# EAGLE board P.V.S.AVINASH AS-3 (EAGLE 9.6.2)
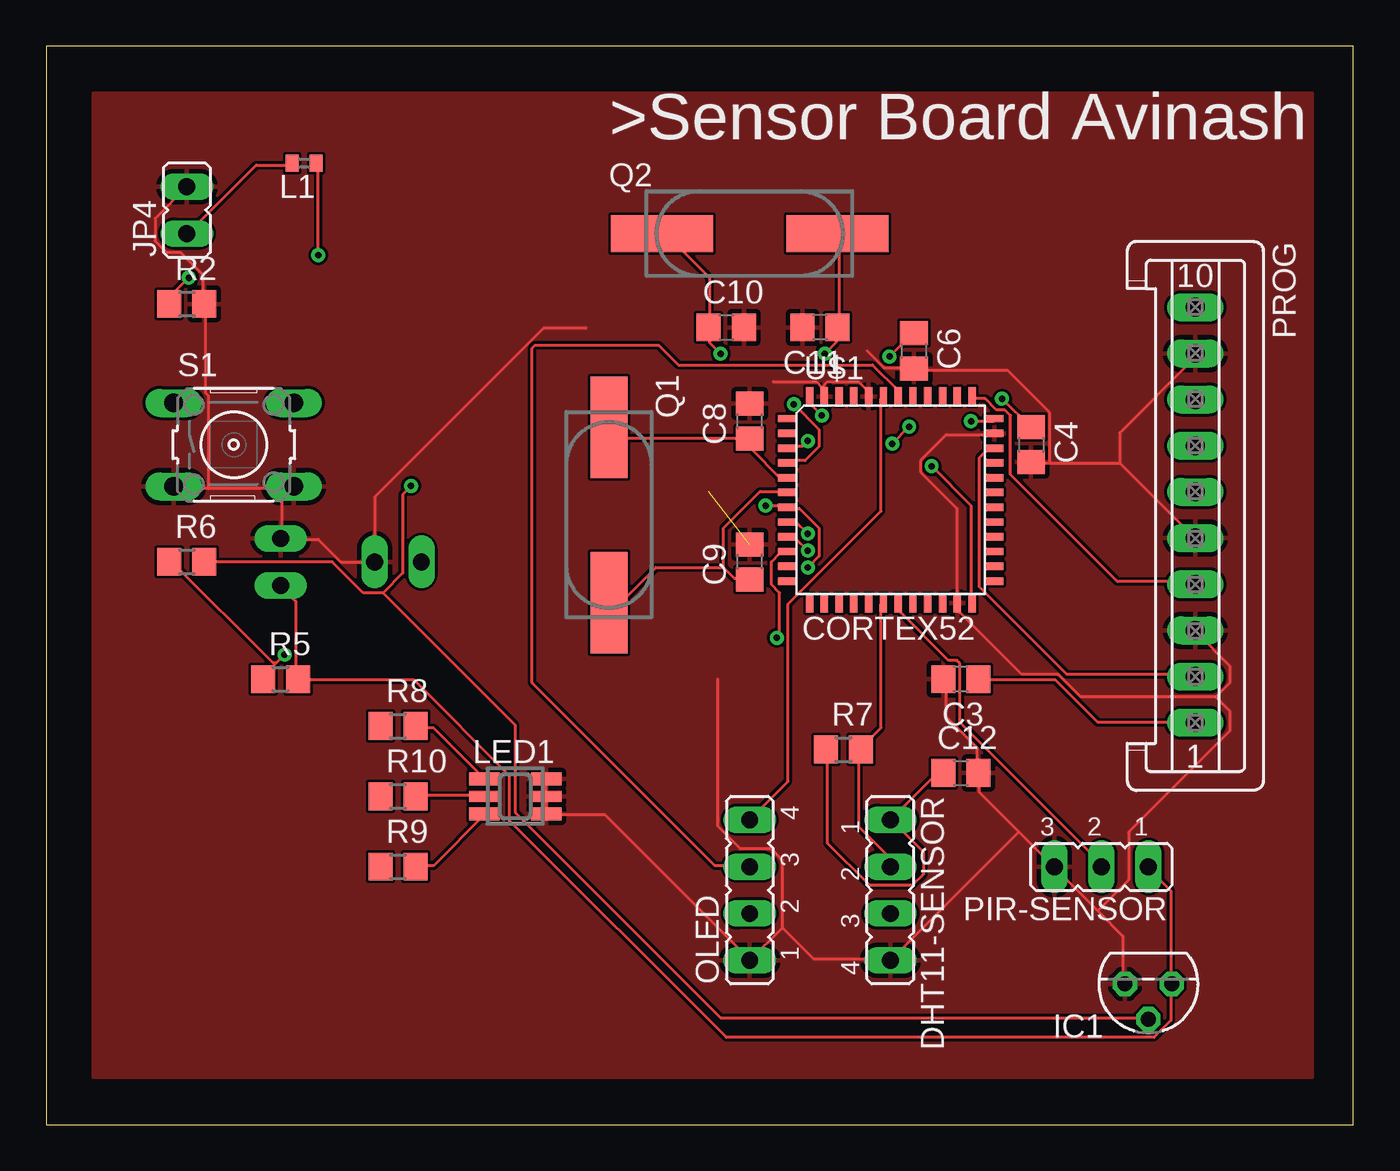
[diagram p0: board, top side]
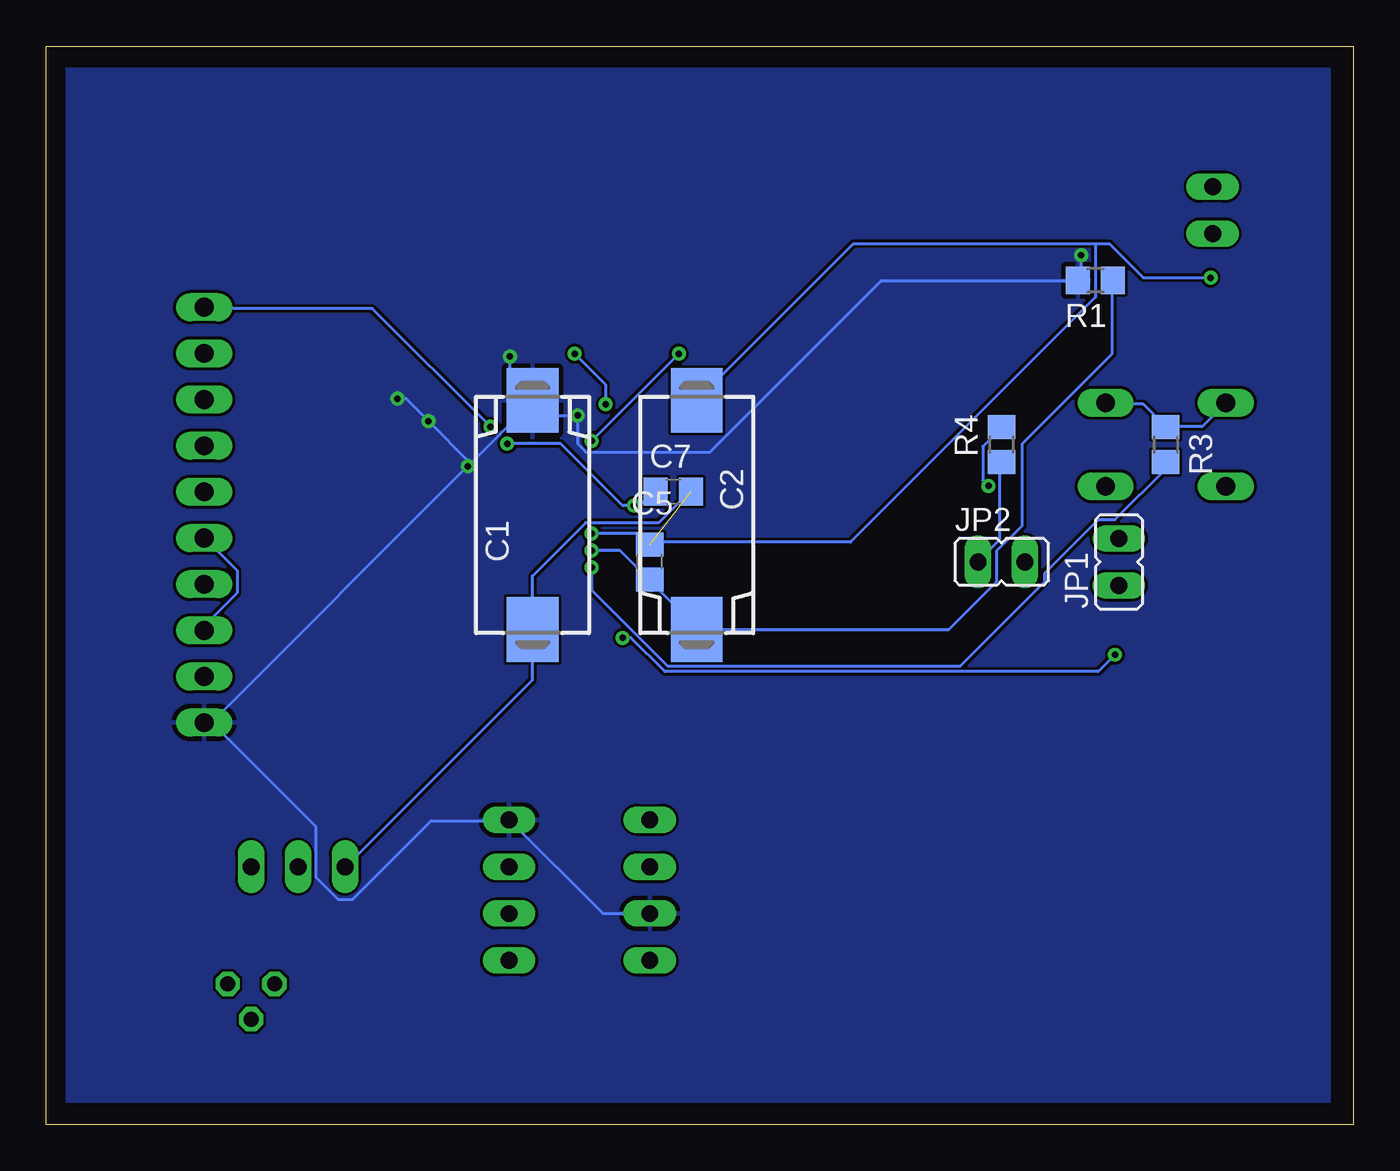
[diagram p1: board, bottom side, seen from below]

Size 70.79 x 58.41 mm. Coordinates in mm from the lower left corner, seen from the top.
Outline: 0,0 70.79,0 70.79,58.41 0,58.41 0,0
Copper layers (1*16): Top 0.035mm / dielectric 1.5mm / Bottom 0.035mm
Design rules "default": minimum track width 6mil, minimum drill 0.35mm, track to track 6mil, track to pad 6mil, pad to pad 6mil, via to via 6mil, smd to smd 6mil, copper to edge 40mil, drill to drill 6mil, minimum pad ring 10mil, minimum via ring 8mil, stop-mask expansion 4mil, vias tented up to drill 0mil, thermal gap 10mil

## Footprints (pad centres in the part's own frame; a part is rotated, then mirrored left to right if it is on the bottom)
139CLL-2R = smd 3.5 x 2.8: + 6.2,0; - -6.2,0
C0805 = smd 1.3 x 1.5: 1 -0.95,0; 2 0.95,0
JP4 = drill 0.914 long: 1 -3.81,0; 2 -1.27,0; 3 1.27,0; 4 3.81,0
TO92 = drill 0.813 octagon: 1 -1.27,0; 2 0,1.905; 3 1.27,0
JP1 = drill 0.914 long: 1 0,-1.27; 2 0,1.27
0402 = smd 0.7 x 0.9: 1 -0.65,0; 2 0.65,0
GM5WA94310A = smd 0.7 x 1.65: 1 -0.95,-1.675; 3 0.95,-1.675; 4 0.95,1.675; 6 -0.95,1.675 | smd 0.6 x 1.65: 2 0,-1.675; 5 0,1.675
JP2 = drill 0.914 long: 1 -2.54,0; 2 0,0; 3 2.54,0
S10P = drill 1.016 long: 1 11.25,0; 2 8.75,0; 3 6.25,0; 4 3.75,0; 5 1.25,0; 6 -1.25,0; 7 -3.75,0; 8 -6.25,0; 9 -8.75,0; 10 -11.25,0
CSM-7X-DU = smd 5.5 x 2: 1 -4.75,0; 2 4.75,0
R0805 = smd 1.3 x 1.5: 1 -0.95,0; 2 0.95,0
B3F-10XX = drill 1.016 long: 1 -3.251,2.261; 2 3.251,2.261; 3 -3.251,-2.261; 4 3.251,-2.261
CORTEX52 = smd 0.4 x 1: BOOT0 3.9,11.5; PA3 0.7,0.3; PA4 1.5,0.3; PA5 2.3,0.3; PA6 3.1,0.3; PA7 3.9,0.3; PA14 9.5,11.5; PA15 8.7,11.5; PB0 4.7,0.3; PB1 5.5,0.3; PB2 6.3,0.3; PB3 7.9,11.5; PB4 7.1,11.5; PB5 6.3,11.5; PB6 5.5,11.5; PB7 4.7,11.5; PB8 3.1,11.5; PB9 2.3,11.5; PB10 7.1,0.3; PB11 7.9,0.3; VDD0 9.5,0.3; VDD2 0.7,11.5; VSS0 8.7,0.3; VSS2 1.5,11.5 | smd 1 x 0.4: NRST -0.5,5.5; OSC32_IN -0.5,8.7; OSC32_OUT -0.5,7.9; OSC_IN -0.5,7.1; OSC_OUT -0.5,6.3; PA0 -0.5,3.1; PA1 -0.5,2.3; PA2 -0.5,1.5; PA8 10.7,4.7; PA9 10.7,5.5; PA10 10.7,6.3; PA11 10.7,7.1; PA12 10.7,7.9; PA13 10.7,8.7; PB12 10.7,1.5; PB13 10.7,2.3; PB14 10.7,3.1; PB15 10.7,3.9; PC13 -0.5,9.5; VDD_USB 10.7,10.3; VDDA -0.5,3.9; VLCD -0.5,10.3; VSS1 10.7,9.5; VSSA -0.5,4.7

## Placement (x,y rotation side)
C1  10uF  [139CLL-2R]  44.45,33.02 90 bottom
C2  1uF  [139CLL-2R]  35.56,33.02 270 bottom
C3  100nF  [C0805]  49.53,24.13 180 top
C4  100nF  [C0805]  53.34,36.83 270 top
C5  100nF  [C0805]  38.1,30.48 90 bottom
C6  100nF  [C0805]  46.99,41.91 270 top
C7  100nF  [C0805]  36.83,34.29 0 bottom
C8  16pF  [C0805]  38.1,38.1 90 top
C9  16pF  [C0805]  38.1,30.48 90 top
C10  12pF  [C0805]  36.83,43.18 0 top
C11  12pF  [C0805]  41.91,43.18 180 top
C12  100nF  [C0805]  49.53,19.05 0 top
DHT11-SENSOR  [JP4]  45.72,12.7 270 top
IC1  AD590ZR  [TO92]  59.69,7.62 180 top
JP1  [JP1]  12.7,30.48 0 bottom
JP2  [JP1]  19.05,30.48 270 bottom
JP4  [JP1]  7.62,49.53 0 top
L1  BLM15HD102SN1  [0402]  13.97,52.07 180 top
LED1  GM5WA94310A  [GM5WA94310A]  25.4,17.78 270 top
OLED  [JP4]  38.1,12.7 90 top
PIR-SENSOR  [JP2]  57.15,13.97 180 top
PROG  [S10P]  62.23,33.02 270 top
Q1  CSM-7X-DU  [CSM-7X-DU]  30.48,33.02 270 top
Q2  CSM-7X-DU  [CSM-7X-DU]  38.1,48.26 0 top
R1  0  [R0805]  13.97,45.72 180 bottom
R2  0  [R0805]  7.62,44.45 0 top
R3  0  [R0805]  10.16,36.83 270 bottom
R4  0  [R0805]  19.05,36.83 90 bottom
R5  10K  [R0805]  12.7,24.13 0 top
R6  10K  [R0805]  7.62,30.48 0 top
R7  5K  [R0805]  43.18,20.32 0 top
R8  [R0805]  19.05,21.59 0 top
R9  [R0805]  19.05,13.97 0 top
R10  [R0805]  19.05,17.78 0 top
S1  [B3F-10XX]  10.16,36.83 0 top
U$1  CORTEX52  [CORTEX52]  40.64,27.94 0 top

## Library data of the parts
C1-C12 = rcl; SPICEPREFIX: C
DHT11-SENSOR JP1 JP2 JP4 OLED PIR-SENSOR = jumper
IC1 = linear
L1 = inductors
LED1 = led
PROG = con-amp-mt; OC_FARNELL: unknown; OC_NEWARK: unknown
Q1 Q2 = crystal; OC_FARNELL: unknown; OC_NEWARK: unknown
R1-R10 = rcl; SPICEPREFIX: R
S1 = switch-omron; MPN: B3F-1000; OC_FARNELL: 176432; OC_NEWARK: 36M3542
U$1 = coxtex32

## Nets
5VCC: IC1.1 JP1.1 PIR-SENSOR.1 R5.2
32KHZOSC1: C10.1 Q2.1 U$1.OSC32_IN
32KHZOSC2: C11.1 Q2.2 U$1.OSC32_OUT
!5VCC: JP2.1 R4.1
AGND: C2.- C5.2 R2.1 U$1.VSSA
DHT11: DHT11-SENSOR.2 R7.2 U$1.PB0
GND: C1.- C3.2 C4.2 C6.2 C7.2 C8.2 C9.2 C10.2 C11.2 C12.2 DHT11-SENSOR.4 IC1.3 JP1.2 JP2.2 JP4.2 LED1.4 LED1.5 LED1.6 OLED.1 PIR-SENSOR.3 PROG.3 PROG.5 PROG.9 R2.2 S1.3 S1.4 U$1.BOOT0 U$1.VSS0 U$1.VSS1 U$1.VSS2
LM35: R5.1 R6.1 U$1.PA0
N$1: JP4.1 L1.2
N$2: R3.1 S1.1 S1.2
N$3: IC1.2 R4.2 R6.2
N$4: LED1.1 R8.2
N$5: U$1.VLCD
N$6: LED1.3 R9.2
N$7: LED1.2 R10.2
NRST: C7.1 PROG.10 R3.2 U$1.NRST
OLED_SCL: OLED.3 U$1.PB6
OLED_SDA: OLED.4 U$1.PB7
OSC1: C8.1 Q1.1 U$1.OSC_IN
OSC2: C9.1 Q1.2 U$1.OSC_OUT
PIR: PIR-SENSOR.2 U$1.PB1
PMW_B: R8.1
PMW_G: R9.1
PMW_R: R10.1
PWM_B: U$1.PB5
PWM_G: U$1.PB4
PWM_R: U$1.PB14
SWCLK: PROG.4 U$1.PA14
SWDIO: PROG.2 U$1.PA13
VCC: C1.+ C3.1 C4.1 C6.1 C12.1 DHT11-SENSOR.1 L1.1 OLED.2 PROG.1 R1.2 R7.1 U$1.VDD0 U$1.VDD2 U$1.VDD_USB
VDDA: C2.+ C5.1 R1.1 U$1.VDDA

## Tracks (layer width: path | path; a pad name or v marks a point on that pad's centre or on a via)
5VCC
  Top 0.152: JP1.1 12.75,29.11 13.51,28.35 13.51,24.23 R5.2 13.66,24.08 19.91,24.08 25.1,18.9 25.1,16.46 36.83,4.72 59.99,4.72 60.91,5.64 60.91,7.62 | 60.91,7.62 60.91,12.65 59.69,13.87 PIR-SENSOR.1 | 60.91,7.62 IC1.1
32KHZOSC1  (via drill 0.35)
  Top 0.152: v41.25,37.03 40.95,36.73 40.18,36.73 U$1.OSC32_IN | v36.53,41.76 35.92,42.37 35.92,43.13 C10.1 35.92,43.28 35.92,45.87 33.48,48.31 Q2.1
  Bottom 0.152: v36.53,41.76 v41.25,37.03
32KHZOSC2  (via drill 0.35)
  Top 0.152: v40.49,39.01 41.86,37.64 41.86,36.73 41.1,35.97 40.18,35.97 U$1.OSC32_OUT | v42.16,41.76 42.77,42.37 42.77,43.13 C11.1 42.93,43.28 42.93,48.16 Q2.2
  Bottom 0.152: v40.49,39.01 40.49,40.08 v42.16,41.76
!5VCC
  Bottom 0.152: R4.1 19.15,35.81 19.15,31.7 20.37,30.48 JP2.1
AGND  (via drill 0.35)
  Top 0.152: v41.25,32 40.64,32.61 40.18,32.61 U$1.VSSA | v7.72,45.87 6.81,44.96 6.81,44.5 R2.1
  Bottom 0.152: v41.25,32 38.66,32 38.2,31.55 C5.2 38.05,31.55 27.23,31.55 13.97,44.81 13.97,47.7 | v7.72,45.87 11.38,45.87 13.21,47.7 13.97,47.7 | 13.97,47.7 27.08,47.7 35.46,39.32 C2.-
DHT11
  Top 0.152: U$1.PB0 45.21,28.19 45.21,21.49 44.14,20.42 R7.2 43.99,20.27 43.99,16.15 45.67,14.48 45.67,14.02 DHT11-SENSOR.2
GND  (1 unrouted)
  Top 0.152: C3.2 48.72,24.08 48.72,22.1 50.39,20.42 50.39,19.05 C12.2 50.55,19.05 50.55,17.98 52.68,15.85 | 56.95,11.58 54.66,13.87 PIR-SENSOR.3 54.51,14.02 52.68,15.85 | 56.95,11.58 58.32,10.21 58.32,7.62 IC1.3 | 42.01,39.93 42.01,39.47 U$1.VSS2 42.01,39.93 | 42.01,39.93 41.71,40.23 39.37,40.23 | 42.01,39.93 42.32,40.23 43.99,40.23 44.45,39.78 44.45,39.47 U$1.BOOT0 | LED1.6 27.08,18.59 27.08,17.83 LED1.5 27.08,17.68 27.08,16.92 LED1.4 27.08,16.76 30.28,16.76 38.05,8.99 OLED.1 39.88,10.67 | 36.37,24.13 36.37,16.15 37.59,14.94 39.27,14.94 39.88,14.33 39.88,10.67 | 39.88,10.67 41.55,8.99 45.67,8.99 DHT11-SENSOR.4 52.68,15.85 | JP4.2 5.89,49.07 5.89,47.85 6.5,47.24 7.26,47.24 8.48,46.02 8.48,44.5 R2.2 8.64,44.35 8.64,39.62 8.79,39.47 8.79,34.44 | 12.75,33.83 12.75,31.85 JP1.2 12.75,31.7 14.73,31.7 15.95,30.48 JP2.2 17.78,33.98 26.92,43.13 29.21,43.13 29.21,43.18 | 12.75,33.83 13.36,34.44 S1.4 12.75,33.83 | 8.79,34.44 12.14,34.44 12.75,33.83 | 8.79,34.44 6.96,34.44 S1.3 | U$1.VSS1 51.31,37.34 48.72,37.34 47.35,35.97 47.35,35.36 49.33,33.38 49.33,28.35 U$1.VSS0 49.48,28.19 49.48,27.74 52.83,24.38 54.81,24.38 56.03,23.17 63.35,23.17 | 44.45,41.91 45.36,41 46.89,41 C6.2 47.04,40.84 52.07,40.84 54.36,38.56 54.36,35.81 | 58.17,35.81 54.36,35.81 | 54.36,35.81 53.44,35.81 C4.2 | 58.17,35.81 62.13,31.85 PROG.5 | 58.17,35.81 58.17,37.49 62.13,41.45 62.13,41.76 PROG.9 | 63.35,23.17 64.11,23.93 64.11,24.84 62.28,26.67 PROG.3 | 56.95,11.58 58.62,13.26 58.62,15.85 64.11,21.34 64.11,22.4 63.35,23.17
  Bottom 0.152: C7.2 35.92,34.29 37.59,32.61 41.55,32.61 44.45,29.72 C1.- 44.45,24.08 54.51,14.02 PIR-SENSOR.3 | PROG.3 62.13,26.82 62.13,27.13 60.45,28.8 60.45,30.02 62.13,31.7 PROG.5
  pour Top: 26.67,41.91 26.67,24.13 39.37,24.13 39.37,40.64 33.02,40.64 33.02,41.91
  pour Top: 29.21,52.07 46.99,52.07 46.99,45.72 46.99,44.45 44.45,44.45 44.45,41.91 34.29,41.91 34.29,43.18 29.21,43.18
  pour Top: 2.54,55.88 68.58,55.88 68.58,2.54 2.54,2.54
LM35  (via drill 0.35)
  Top 0.152: v39.57,26.37 39.73,26.52 39.73,28.8 39.27,29.26 39.27,30.48 39.73,30.94 40.03,30.94 U$1.PA0 | 12.45,24.99 11.68,24.23 R5.1 | 12.45,24.99 v12.9,25.45 | 12.45,24.99 12.29,24.99 6.81,30.48 R6.1
  Bottom 0.152: v39.57,26.37 39.12,26.37 37.29,24.54 13.82,24.54 v12.9,25.45
N$1
  Top 0.152: L1.2 13.21,51.97 11.38,51.97 7.72,48.31 JP4.1
N$2
  Bottom 0.152: 10.16,37.79 8.18,37.79 6.96,39.01 S1.1 | 10.16,37.79 11.38,39.01 13.36,39.01 S1.2 | 10.16,37.79 R3.1
N$3  (via drill 0.35)
  Top 0.152: R6.2 15.49,30.48 17.17,28.8 18.24,28.8 | 18.24,28.8 19.3,29.87 19.3,34.14 v19.76,34.59 | 18.24,28.8 25.4,21.64 25.4,16.92 36.53,5.79 59.69,5.79 IC1.2
  Bottom 0.152: v19.76,34.59 20.07,34.9 20.07,36.73 19.15,37.64 R4.2
N$4
  Top 0.152: R8.2 20.07,21.49 20.98,21.49 23.72,18.75 LED1.1
N$6
  Top 0.152: R9.2 20.07,14.02 20.98,14.02 23.72,16.76 LED1.3
N$7
  Top 0.152: R10.2 20.07,17.83 23.72,17.83 LED1.2
NRST  (via drill 0.35)
  Top 0.152: v38.96,33.53 40.03,33.53 U$1.NRST 40.18,33.38 40.79,33.38 41.86,32.31 41.86,30.79 v41.25,30.18 | v45.82,36.88 v46.74,37.79
  Bottom 0.152: C7.1 37.9,34.29 38.66,33.53 v38.96,33.53 39.57,33.53 42.93,36.88 v45.82,36.88 | R3.2 10.16,35.51 12.9,32.77 13.82,32.77 16.71,29.87 16.71,29.41 21.29,24.84 37.14,24.84 41.25,28.96 v41.25,30.18 | v46.74,37.79 53.14,44.2 62.13,44.2 PROG.10
OLED_SCL
  Top 0.152: U$1.PB6 46.13,39.47 46.13,39.78 44.75,41.15 34.24,41.15 33.17,42.21 26.47,42.21 26.31,42.06 26.31,23.93 36.22,14.02 38.05,14.02 OLED.3
OLED_SDA
  Top 0.152: OLED.4 40.18,18.59 40.18,28.19 45.21,33.22 45.21,39.32 U$1.PB7
OSC1
  Top 0.152: U$1.OSC_IN 40.03,35.05 39.73,35.05 38.2,36.58 38.2,37.03 C8.1 38.05,37.19 31.04,37.19 30.58,37.64 Q1.1
OSC2
  Top 0.152: 36.68,30.18 36.68,32.31 38.66,34.29 40.03,34.29 U$1.OSC_OUT | 36.68,30.18 37.29,29.57 38.05,29.57 C9.1 | 36.68,30.18 33.02,30.18 31.19,28.35 30.58,28.35 Q1.2
PIR
  Top 0.152: U$1.PB1 46.28,28.19 46.28,27.74 48.87,25.15 49.33,25.15 49.48,24.99 49.48,21.79 57.25,14.02 PIR-SENSOR.2
SWCLK
  Top 0.152: U$1.PA14 50.24,39.32 50.85,39.32 51.46,38.71 51.92,38.71 52.22,38.41 52.22,35.2 58.01,29.41 62.13,29.41 PROG.4
SWDIO
  Top 0.152: U$1.PA13 51.31,36.58 51,36.58 50.55,36.12 50.55,29.11 55.27,24.38 62.13,24.38 PROG.2
VCC  (via drill 0.35)
  Top 0.152: R7.1 42.32,20.27 42.32,15.24 44.6,12.95 46.89,12.95 47.5,13.56 47.5,14.78 45.82,16.46 DHT11-SENSOR.1 48.26,19.05 C12.1 | C3.1 50.55,24.08 54.66,24.08 56.95,21.79 62.13,21.79 PROG.1 | v14.73,47.09 14.73,51.97 L1.1 | v47.95,35.66 50.09,33.53 50.09,28.35 U$1.VDD0 | v42.01,38.41 41.4,39.01 41.4,39.32 U$1.VDD2 | v50.09,38.1 51.31,38.1 U$1.VDD_USB | v45.67,41.6 46.89,42.82 C6.1 | v51.77,39.32 53.29,37.79 C4.1
  Bottom 0.152: OLED.2 40.64,11.43 DHT11-SENSOR.1 45.82,16.46 49.94,16.46 54.2,12.19 54.97,12.19 56.19,13.41 56.19,16.15 61.82,21.79 | v14.73,47.09 14.73,45.87 14.88,45.72 R1.2 25.55,45.72 34.85,36.42 41.55,36.42 42.01,36.88 v42.01,38.41 43.69,38.41 44.45,39.17 | 44.45,39.17 47.8,35.81 | 44.45,39.17 C1.+ 44.45,39.32 45.67,40.54 v45.67,41.6 | 47.8,35.81 v50.09,38.1 51.31,39.32 v51.77,39.32 | 47.8,35.81 v47.95,35.66 61.82,21.79 | 61.82,21.79 62.13,21.79 PROG.1 61.82,21.79
  pour Bottom: 1.27,57.15 69.85,57.15 69.85,1.27 1.27,1.27
VDDA  (via drill 0.35)
  Top 0.152: v41.25,31.09 40.64,31.7 40.18,31.7 U$1.VDDA
  Bottom 0.152: v41.25,31.09 39.73,31.09 38.2,29.57 C5.1 38.05,29.41 35.46,26.82 | 35.46,26.82 21.89,26.82 19.3,29.41 19.3,31.09 17.93,32.46 17.93,36.88 13.06,41.76 13.06,45.72 R1.1 | 35.46,26.82 C2.+

## Text on the board
tPlace: >Sensor Board Avinash